# EAGLE board sensor (EAGLE 9.4.2)
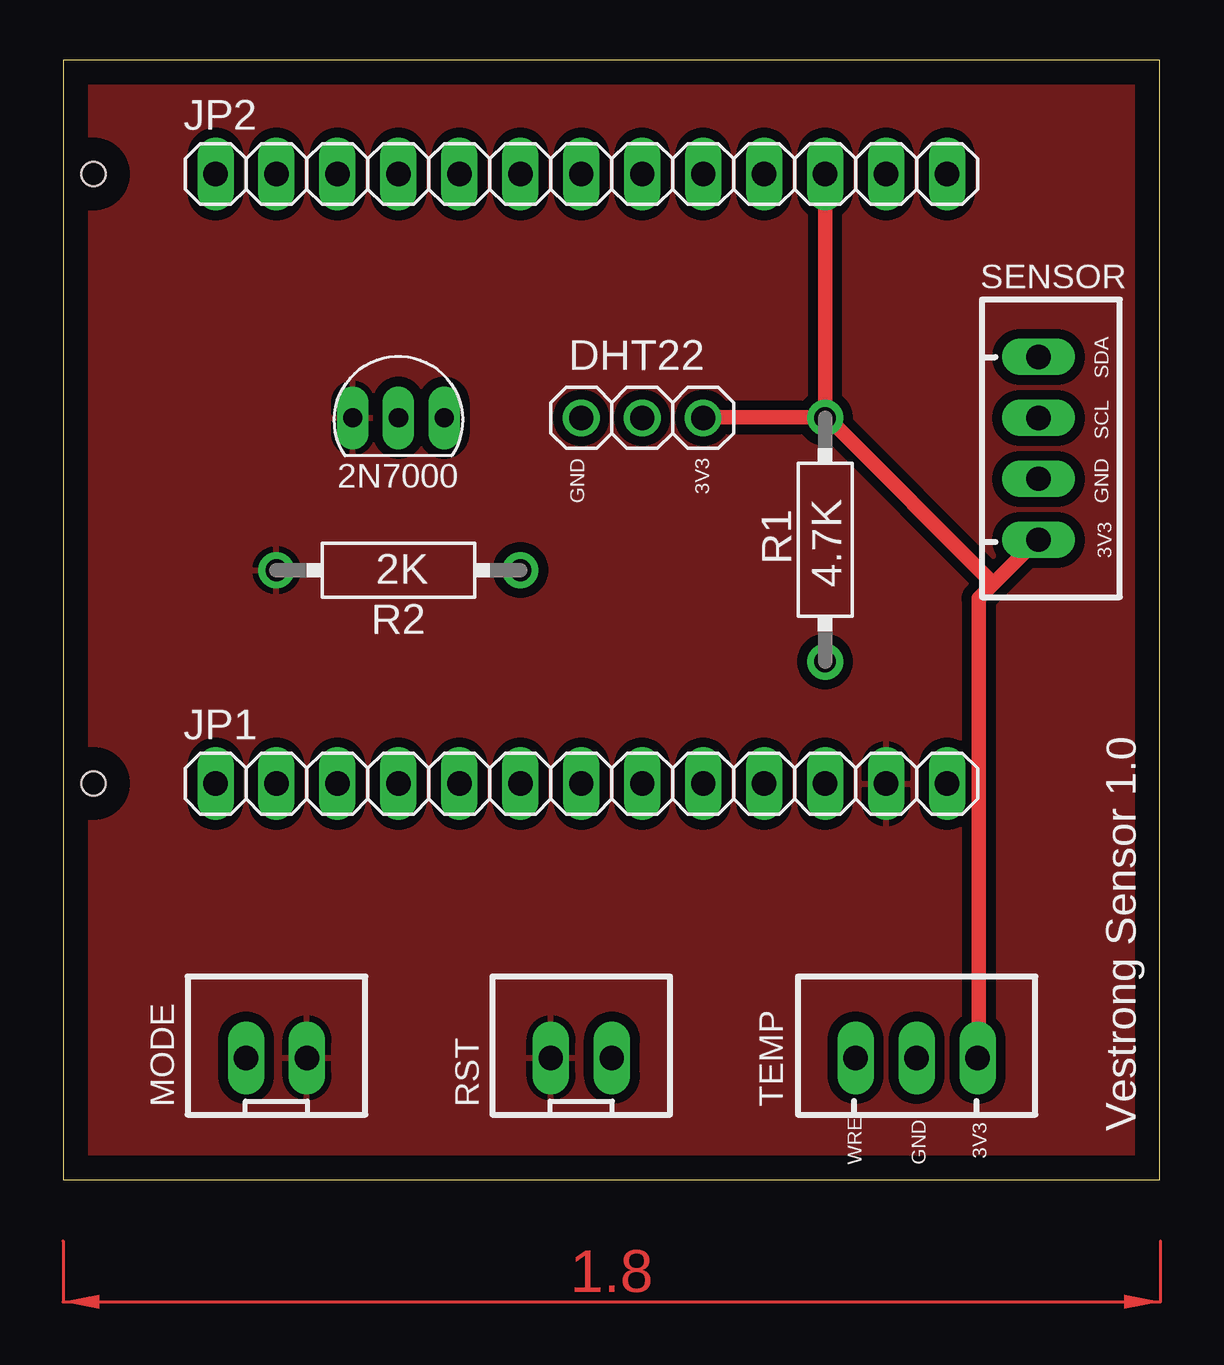
[diagram p0: board, top side]
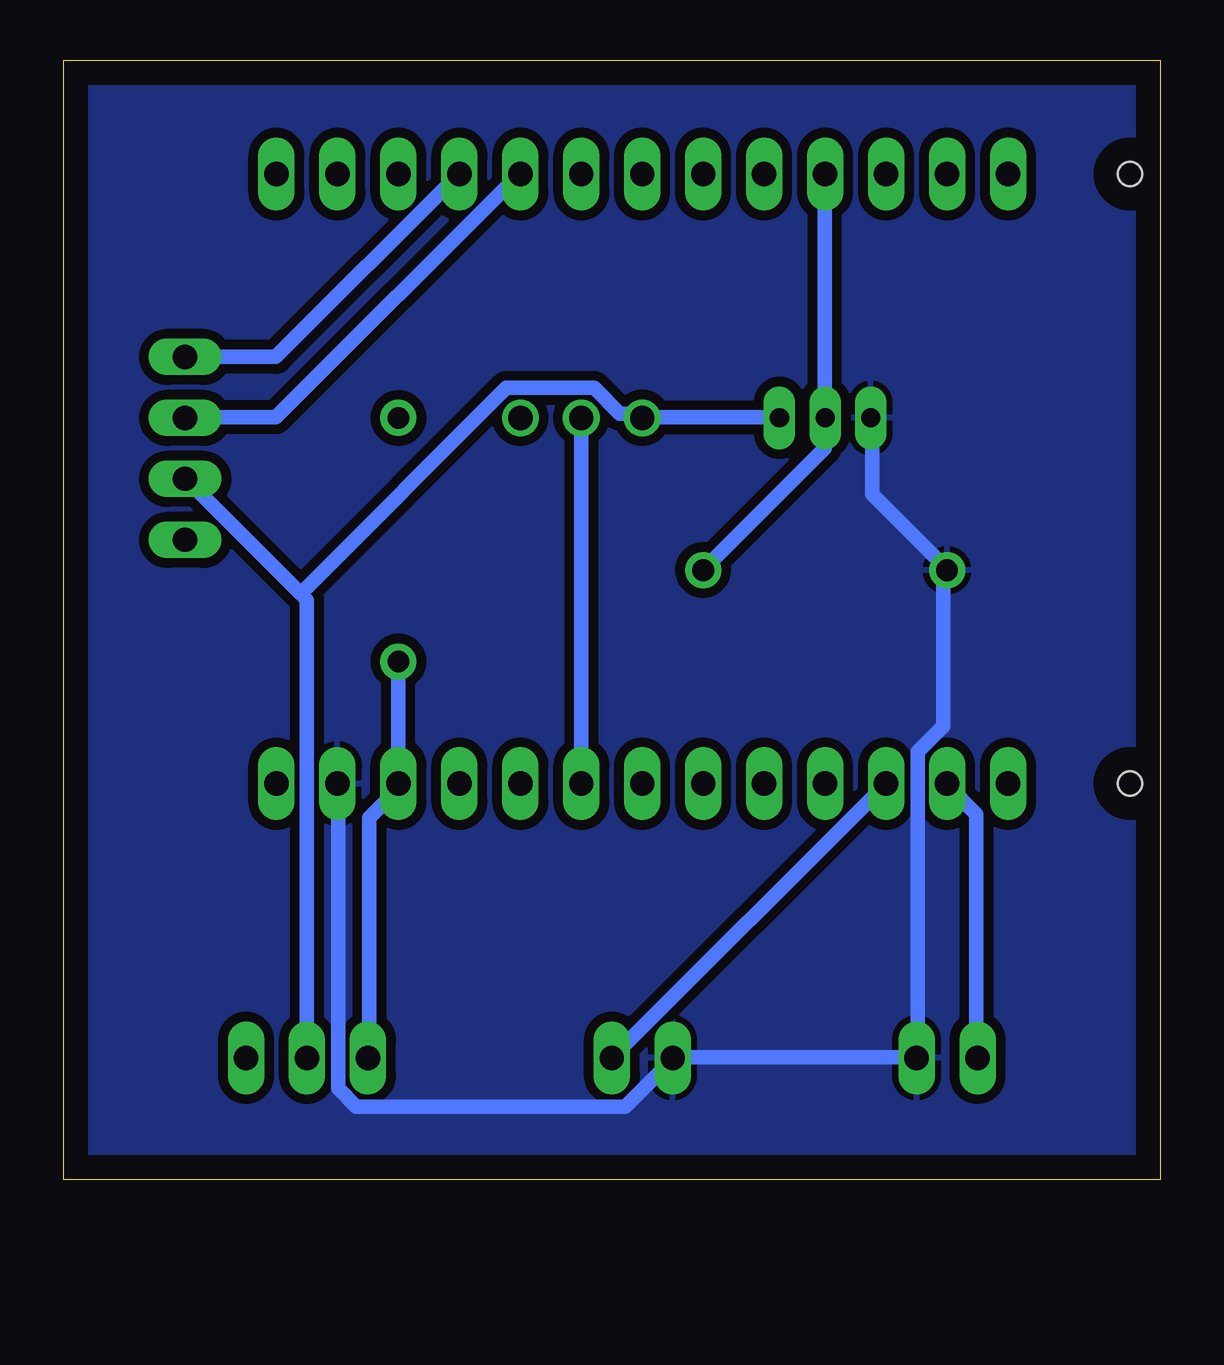
[diagram p1: board, bottom side, seen from below]

Size 45.7 x 46.66 mm. Coordinates in mm from the lower left corner, seen from the top.
Outline: 0,0 45.7,0 45.7,46.66 0,46.66 0,0
Copper layers (1*16): Top 0.035mm / dielectric 1.5mm / Bottom 0.035mm
Design rules "default": minimum track width 6mil, minimum drill 0.35mm, track to track 6mil, track to pad 6mil, pad to pad 6mil, via to via 6mil, smd to smd 6mil, copper to edge 40mil, drill to drill 6mil, minimum pad ring 10mil, minimum via ring 8mil, stop-mask expansion 4mil, vias tented up to drill 0mil, thermal gap 10mil
Net classes: 1 pwr: width 0.6 mm
Holes 1 mm at 1.27,16.51 1.27,41.91

## Footprints (pad centres in the part's own frame; a part is rotated, then mirrored left to right if it is on the bottom)
1X03 = drill 1.016: 1 -2.54,0; 2 0,0; 3 2.54,0
1X13 = drill 1.016 long: 1 -15.24,0; 2 -12.7,0; 3 -10.16,0; 4 -7.62,0; 5 -5.08,0; 6 -2.54,0; 7 0,0; 8 2.54,0; 9 5.08,0; 10 7.62,0; 11 10.16,0; 12 12.7,0; 13 15.24,0
JST-XH-02-PACKAGE-LONG-PAD = drill 1.016 long: 1 -1.27,0; 2 1.27,0
TO92 = drill 0.8 pad 1.27 long: B 0,0; C 0,-1.905; E 0,1.905
HPS58 = drill 0.9 pad 1.5: 1 -5.08,0; 2 5.08,0
JST-XH-04-PACKAGE-LONG-PAD = drill 1.016 long: 1 -3.81,0; 2 -1.27,0; 3 1.27,0; 4 3.81,0
JST-XH-03-PACKAGE-LONG-PAD = drill 1.016 long: 1 -2.54,0; 2 0,0; 3 2.54,0

## Placement (x,y rotation side)
DHT22  DHT22  [1X03]  24.13,31.75 180 top
JP1  JP1  [1X13]  21.59,16.51 0 top
JP2  JP2  [1X13]  21.59,41.91 0 top
MODE  JST-XH-02-PIN-LONG-PAD  [JST-XH-02-PACKAGE-LONG-PAD]  8.89,5.08 0 top
MOSFET1  2N7000  [TO92]  13.97,31.75 270 top
R1  4.7K  [HPS58]  31.75,26.67 270 top
R2  2K  [HPS58]  13.97,25.4 0 top
RST  JST-XH-02-PIN-LONG-PAD  [JST-XH-02-PACKAGE-LONG-PAD]  21.59,5.08 0 top
SENSOR  JST-XH-04-PIN-LONG-PAD  [JST-XH-04-PACKAGE-LONG-PAD]  40.64,30.48 270 top
TEMP  JST-XH-03-PIN-LONG-PAD  [JST-XH-03-PACKAGE-LONG-PAD]  35.56,5.08 0 top

## Library data of the parts
DHT22 JP1 JP2 = adafruit
MODE RST SENSOR TEMP = Rembrandt Electronics - JST XH Connectors v1-0
MOSFET1 = 2N7000; AVAILABILITY: Unavailable; DESCRIPTION: MOSFETs- Power and Small Signal 60V 200mA N-Channel No-Cancel/No-Return; MF: STMicroelectronics; MP: 2N7000; PACKAGE: TO-92 ON Semiconductor; PRICE: None
R1 R2 = resistor-power; OC_FARNELL: unknown; OC_NEWARK: unknown

## Nets
1WIRE [pwr]: JP1.11 R1.2 TEMP.1
3.3V [pwr]: DHT22.1 JP2.11 R1.1 SENSOR.4 TEMP.3
DATA_T [pwr]: DHT22.2 JP1.8
GND [pwr]: JP1.12 MODE.2 MOSFET1.C R2.1 RST.1
MODE [pwr]: JP1.2 MODE.1
RST [pwr]: JP1.3 RST.2
SCL [pwr]: JP2.9 SENSOR.2
SDA [pwr]: JP2.10 SENSOR.1
SENS_ENABLE [pwr]: JP2.4 MOSFET1.B R2.2
SENS_GND [pwr]: DHT22.3 MOSFET1.E SENSOR.3 TEMP.2

## Tracks (layer width: path | path; a pad name or v marks a point on that pad's centre or on a via)
1WIRE
  Bottom 0.6: R1.2 JP1.11 31.83,16.23 32.97,15.09 32.97,5.11 TEMP.1
3.3V
  Top 0.6: R1.1 31.75,31.77 26.72,31.77 DHT22.1 | R1.1 JP2.11 | 38.76,24.84 40.59,26.67 SENSOR.4 | 38.76,24.84 38.15,24.23 38.15,5.11 TEMP.3 | 38.76,24.84 31.98,31.62 R1.1
DATA_T
  Bottom 0.6: DHT22.2 JP1.8
GND
  Bottom 0.6: MOSFET1.C 12.01,31.7 12.01,28.57 8.89,25.45 R2.1 9.04,25.15 9.04,18.9 10.11,17.83 10.11,5.33 MODE.2 10.19,5.11 20.32,5.11 RST.1 20.47,4.88 22.3,3.05 33.5,3.05 34.27,3.81 34.27,16.46 JP1.12
  pour Bottom (isolate 0.406): 0,0 0,46.99 45.72,46.99 45.72,0
  pour Top (isolate 0.406): 0,46.99 45.72,46.99 45.72,0 0,0
MODE
  Bottom 0.6: MODE.1 7.67,5.11 7.67,15.24 8.89,16.46 JP1.2
RST
  Bottom 0.6: JP1.3 RST.2
SCL
  Bottom 0.6: SENSOR.2 40.59,31.77 36.85,31.77 26.72,41.91 JP2.9
SDA
  Bottom 0.6: SENSOR.1 36.85,34.29 29.23,41.91 JP2.10
SENS_ENABLE
  Bottom 0.6: R2.2 19.02,25.45 13.99,30.48 13.99,31.7 MOSFET1.B 13.99,32 13.99,41.91 JP2.4
SENS_GND
  Bottom 0.6: MOSFET1.E 15.9,31.77 21.54,31.77 DHT22.3 21.84,31.93 22.53,31.93 23.6,32.99 27.25,32.99 35.83,24.42 | TEMP.2 35.56,24.16 35.83,24.42 | 35.83,24.42 40.59,29.18 SENSOR.3
(copper drawn outside any net)
  shapes: Top area x2

## Text on the board
tPlace: SDA | SCL | 3V3 | GND | GND | 3V3 | Vestrong Sensor 1.0 | WRE | GND | 3V3